# Altium PCB pcb.PcbDoc
Units mil, origin at the board's own origin, x right, y up, seen from the top; angles counter-clockwise.
Board outline 2834.65 x 1102.36 mil, 2 copper layers (Top Layer, Bottom Layer); 19 components, 27 nets, 98 pads, 0 vias.
Unrouted connection lines stored in the file: 47.
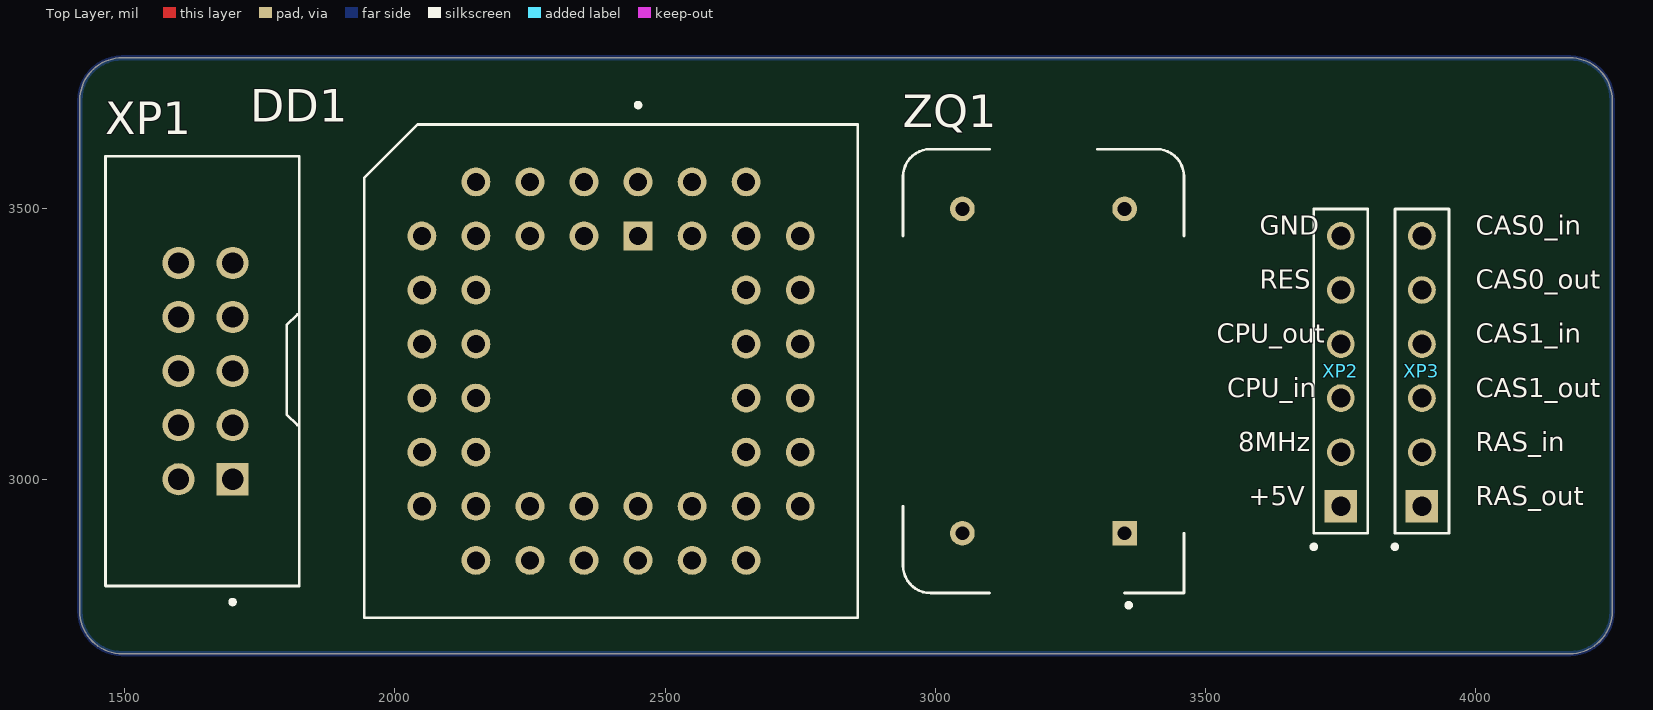
[diagram p0: Top Layer view]
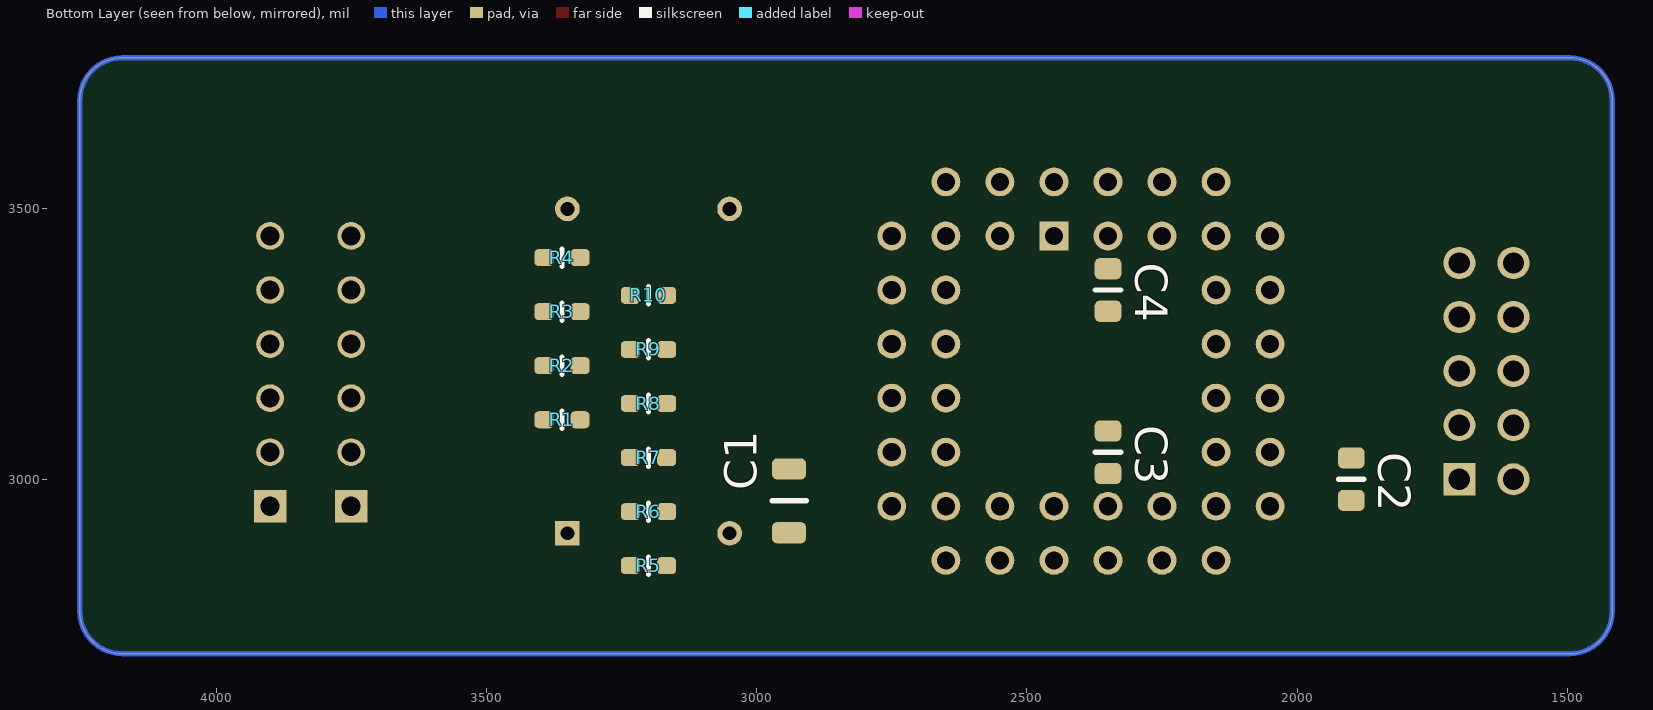
[diagram p1: Bottom Layer view, seen from below]

## Layer stack, top to bottom
Top Solder: solder mask 0.4, Solder Resist, Dk 3.5
Top Layer: signal copper 1.4
Dielectric 1: dielectric 12.6, FR-4, Dk 4.8
Bottom Layer: signal copper 1.4
Bottom Solder: solder mask 0.4, Solder Resist, Dk 3.5

## Board outline
1496.06,2677.17 cw(c1496.06,2755.91) 1417.32,2755.91 1417.32,3700.79 cw(c1496.06,3700.79) 1496.06,3779.53 4173.23,3779.53 cw(c4173.23,3700.79) 4251.97,3700.79 4251.97,2755.91 cw(c4173.23,2755.91) 4173.23,2677.17

## Design rules (kind name [scope] priority, off if disabled: settings)
Clearance [All] p1: gap=10 ignorepadtopadclearanceinfootprint=FALSE except(0: Arc-Hole Track-Hole SMDPad-Hole THPad-Hole Via-Hole Fill-Hole Poly-Hole Region-Hole Text-Hole)
PolygonConnect [All] p1: connectstyle=Relief reliefconductorwidth=10 reliefentries=4 polygonreliefangle="90 Angle" airgapwidth=10
RoomDefinition main [InComponentClass('main')] p1: confinementstyle=ConfineIn formatcopy=TRUE lockcomponents=FALSE outline 1338.58,2637.8 4330.71,2637.8 4330.71,3818.9 1338.58,3818.9
RoutingVias [All] p1: holewidth=28 width=50 viastyle="Through Hole" minholewidth=28 minwidth=50 maxholewidth=28 maxwidth=50
SolderMaskExpansion [All] p1: expansion=4
Width [All] p1: maxlimit=10 minlimit=10 preferedwidth=10
30 further rules are at their usual default settings.

## Classes and differential pairs
component class main: C1 C2 C3 C4 DD1 R1 R2 R3 R4 R5 R6 R7 R8 R9 R10 XP1 XP3 ZQ1

## Components (designator, comment, footprint, x,y, rotation, side; value= is the part's Value field where it differs from the comment)
C1 "22uF" С1206 2940,2960 r90 bottom
C2 "10uF" C0805 1900,3000 r270 bottom
C3 "10uF" C0805 2350,3050 r90 bottom
C4 "10uF" C0805 2350,3350 r270 bottom
DD1 "EPM7064SLC44" PLCC-44-R 2400,3200 r0 top
R1 "22" R0603 3360,3110 r0 bottom
R2 "22" R0603 3360,3210 r0 bottom
R3 "22" R0603 3360,3310 r0 bottom
R4 "22" R0603 3360,3410 r0 bottom
R5 "22" R0603 3200,2840 r0 bottom
R6 "22" R0603 3200,2940 r0 bottom
R7 "22" R0603 3200,3040 r0 bottom
R8 "22" R0603 3200,3140 r0 bottom
R9 "22" R0603 3200,3240 r0 bottom
R10 "22" R0603 3200,3340 r0 bottom
XP1 "BH-10" BH-10 1650,3200 r90 top
XP2 "PLS-6" 6pin 3750,3200 r90 top
XP3 "PLS-6" 6pin 3900,3200 r90 top
ZQ1 "64MHz" OSC_ECS-100A-240 3200,3200 r90 top

## Footprints (in the part's own frame and the unit in brackets; to place one, negate y for a bottom-side part, rotate by r counter-clockwise, add the part's x,y. Pads: shape width x height; smd on the part's side, far side on the other; paste and mask are expansions set on the pad)
6pin [mm]
  rect 1.524x1.524 hole 0.9: 1(-6.35,0)
  round 1.3 hole 0.9: 2(-3.81,0) 3(-1.27,0) 4(1.27,0) 5(3.81,0) 6(6.35,0)
  silkscreen extent -8.35,-1.27 7.62,1.37
BH-10 [mm]
  rect 1.508x1.508 / inner round 1.508 / far side rect 1.508x1.508 hole 1: 1(-5.08,-1.27)
  round 1.508 hole 1: 2(-5.08,1.27) 3(-2.54,-1.27) 4(-2.54,1.27) 5(0,-1.27) 6(0,1.27) 7(2.54,-1.27) 8(2.54,1.27) 9(5.08,-1.27) 10(5.08,1.27)
  silkscreen extent -10.95,-4.4 10.1,4.7, body extent -10.1,-4.39 10.1,4.7, height 9.09
C0805 [mm] "Chip_Capasitor_0805"
  rrect50% 1x1.25 smd mask+0.102: 1(-1,0) 2(1,0)
  silkscreen extent 0,-0.6 0,0.6, body extent -1,-0.64 1,0.64, height 1.35
OSC_ECS-100A-240 [mm]
  rect 1.158x1.158 hole 0.65: 1(-7.62,-3.81)
  round 1.158 hole 0.65: 7(7.62,-3.81) 8(7.62,3.81) 14(-7.62,3.81)
  silkscreen extent -11.1,-6.6 10.43,6.6, body extent -10.38,-6.6 10.48,6.6, height 7.35
PLCC-44-R [mm]
  rect 1.358x1.358 hole 0.85: 1(1.27,6.35)
  round 1.358 hole 0.85: 2(-1.27,8.89) 3(-1.27,6.35) 4(-3.81,8.89) 5(-3.81,6.35) 6(-6.35,8.89) 7(-8.89,6.35) 8(-6.35,6.35) 9(-8.89,3.81) 10(-6.35,3.81) 11(-8.89,1.27) 12(-6.35,1.27) 13(-8.89,-1.27) 14(-6.35,-1.27) 15(-8.89,-3.81) 16(-6.35,-3.81) 17(-8.89,-6.35) 18(-6.35,-8.89) 19(-6.35,-6.35) 20(-3.81,-8.89) 21(-3.81,-6.35) 22(-1.27,-8.89) 23(-1.27,-6.35) 24(1.27,-8.89) 25(1.27,-6.35) 26(3.81,-8.89) 27(3.81,-6.35) 28(6.35,-8.89) 29(8.89,-6.35) 30(6.35,-6.35) 31(8.89,-3.81) 32(6.35,-3.81) 33(8.89,-1.27) 34(6.35,-1.27) 35(8.89,1.27) 36(6.35,1.27) 37(8.89,3.81) 38(6.35,3.81) 39(8.89,6.35) 40(6.35,8.89) 41(6.35,6.35) 42(3.81,8.89) 43(3.81,6.35) 44(1.27,8.89)
  silkscreen extent -11.59,-11.59 11.59,12.6, body extent -11.74,-11.74 11.74,11.74, height 8.31
R0603 [mm] "Chip_Resistor_0603"
  rrect50% 0.9x0.8 smd mask+0.1: 1(-0.85,0) 2(0.85,0)
  silkscreen extent 0,-0.4 0,0.4, body extent -0.8,-0.4 0.8,0.4, height 0.45
С1206 [mm] "Chip_Capasitor_1206"
  rrect50% 1x1.6 smd mask+0.102: 1(-1.5,0) 2(1.5,0)
  silkscreen extent 0,-0.8 0,0.8, body extent -1.6,-0.81 1.6,0.81, height 1.11

## Part data
C1 C2 C3 C4: library part CapCer
DD1: "44-Pin PLCC44"
R1 R2 R3 R4 R5 R6 R7 R8 R9 R10: library part Res, "22 Ом 0603"
XP1: "10 Position Total Dual Row 2.54 mm Pitch Straight Male Shrouded Box Header", Package=None, Check_prices=https://www.snapeda.com/parts/SBH11-PBPC-D05-ST-BK/Sullins+Connector+Solutions/view-part/?ref=eda, MF="Sullins Connector", MP=SBH11-PBPC-D05-ST-BK, SnapEDA_Link=https://www.snapeda.com/parts/SBH11-PBPC-D05-ST-BK/Sullins+Connector+Solutions/view-part/?ref=snap
ZQ1: library part KXO-240, "Oscillator  14-DIP, 4 Leads (Full Size, Metal Can)", Package=None, Availability=Unavailable, MP=ECS-100A-240, Price=None

## Nets (pads, with @x,y where several pads share a name; then routed paths per layer and width w, separated by ;. In a path a pad name is that pad's centre, name@x,y a point inside that pad or via, vN(x,y) a via of type N, cw(c..) or ccw(c..) an arc to the next point about the centre after c; other vN are vias at no path point)
8MHz: DD1.33 R1.1
+5.0V: C1.1 C2.1 C3.1 C4.1 DD1.3 DD1.15 DD1.23 DD1.35 XP1.4 XP2.1 ZQ1.14
CAS0_IN: DD1.39 R10.1
CAS0_OUT: DD1.37 R9.1
CAS1_IN: DD1.34 R8.1
CAS1_OUT: DD1.31 R7.1
CLK: DD1.43 ZQ1.8
CPU_CLK_in: DD1.41 R2.1
CPU_CLK_out: DD1.40 R3.1
GND: C1.2 C2.2 C3.2 C4.2 DD1.10 DD1.17 DD1.22 DD1.30 DD1.42 XP1.2 XP1.10 XP2.6 ZQ1.7
NetR1_2: R1.2 XP2.2
NetR2_2: R2.2 XP2.3
NetR3_2: R3.2 XP2.4
NetR4_2: R4.2 XP2.5
NetR5_2: R5.2 XP3.1
NetR6_2: R6.2 XP3.2
NetR7_2: R7.2 XP3.3
NetR8_2: R8.2 XP3.4
NetR9_2: R9.2 XP3.5
NetR10_2: R10.2 XP3.6
RAS_IN: DD1.29 R6.1
RAS_OUT: DD1.28 R5.1
RES: DD1.1 R4.1
TCK: DD1.32 XP1.1
TDI: DD1.7 XP1.9
TDO: DD1.38 XP1.3
TMS: DD1.13 XP1.5
pads on no net: DD1.2 DD1.4 DD1.5 DD1.6 DD1.8 DD1.9 DD1.11 DD1.12 DD1.14 DD1.16 DD1.18 DD1.19 DD1.20 DD1.21 DD1.24 DD1.25 DD1.26 DD1.27 DD1.36 DD1.44 XP1.6 XP1.7 XP1.8 ZQ1.1
copper on no net: | length 7738.8
  Bottom Layer w10: 1417.32,2755.91 ccw(c1496.06,2755.91) 1496.06,2677.17 4173.23,2677.17 ccw(c4173.23,2755.91) 4251.97,2755.91 4251.97,3700.79 ccw(c4173.23,3700.79) 4173.23,3779.53 1496.06,3779.53 ccw(c1496.06,3700.79) 1417.32,3700.79 1417.32,2755.91

## Silkscreen, mask and mechanical layers (free items; w line width, h text height)
Top Overlay:
  text "GND" at 3600,3440 h60
  text "CAS0_in" at 4000,3440 h60
  text "RES" at 3600,3340 h60
  text "CAS0_out" at 4000,3340 h60
  text "CPU_out" at 3520,3240 h60
  text "CAS1_in" at 4000,3240 h60
  text "CPU_in" at 3540,3140 h60
  text "CAS1_out" at 4000,3140 h60
  text "8MHz" at 3560,3040 h60
  text "RAS_in" at 4000,3040 h60
  text "+5V" at 3580,2940 h60
  text "RAS_out" at 4000,2940 h60